# Altium PCB ClarinetSensor.PcbDoc
Units mm, origin at the board's own origin, x right, y up, seen from the top; angles counter-clockwise.
Board outline 152.4 x 101.6 mm, 2 copper layers (F.Cu, B.Cu); 28 components, 16 nets, 124 pads, 34 vias.
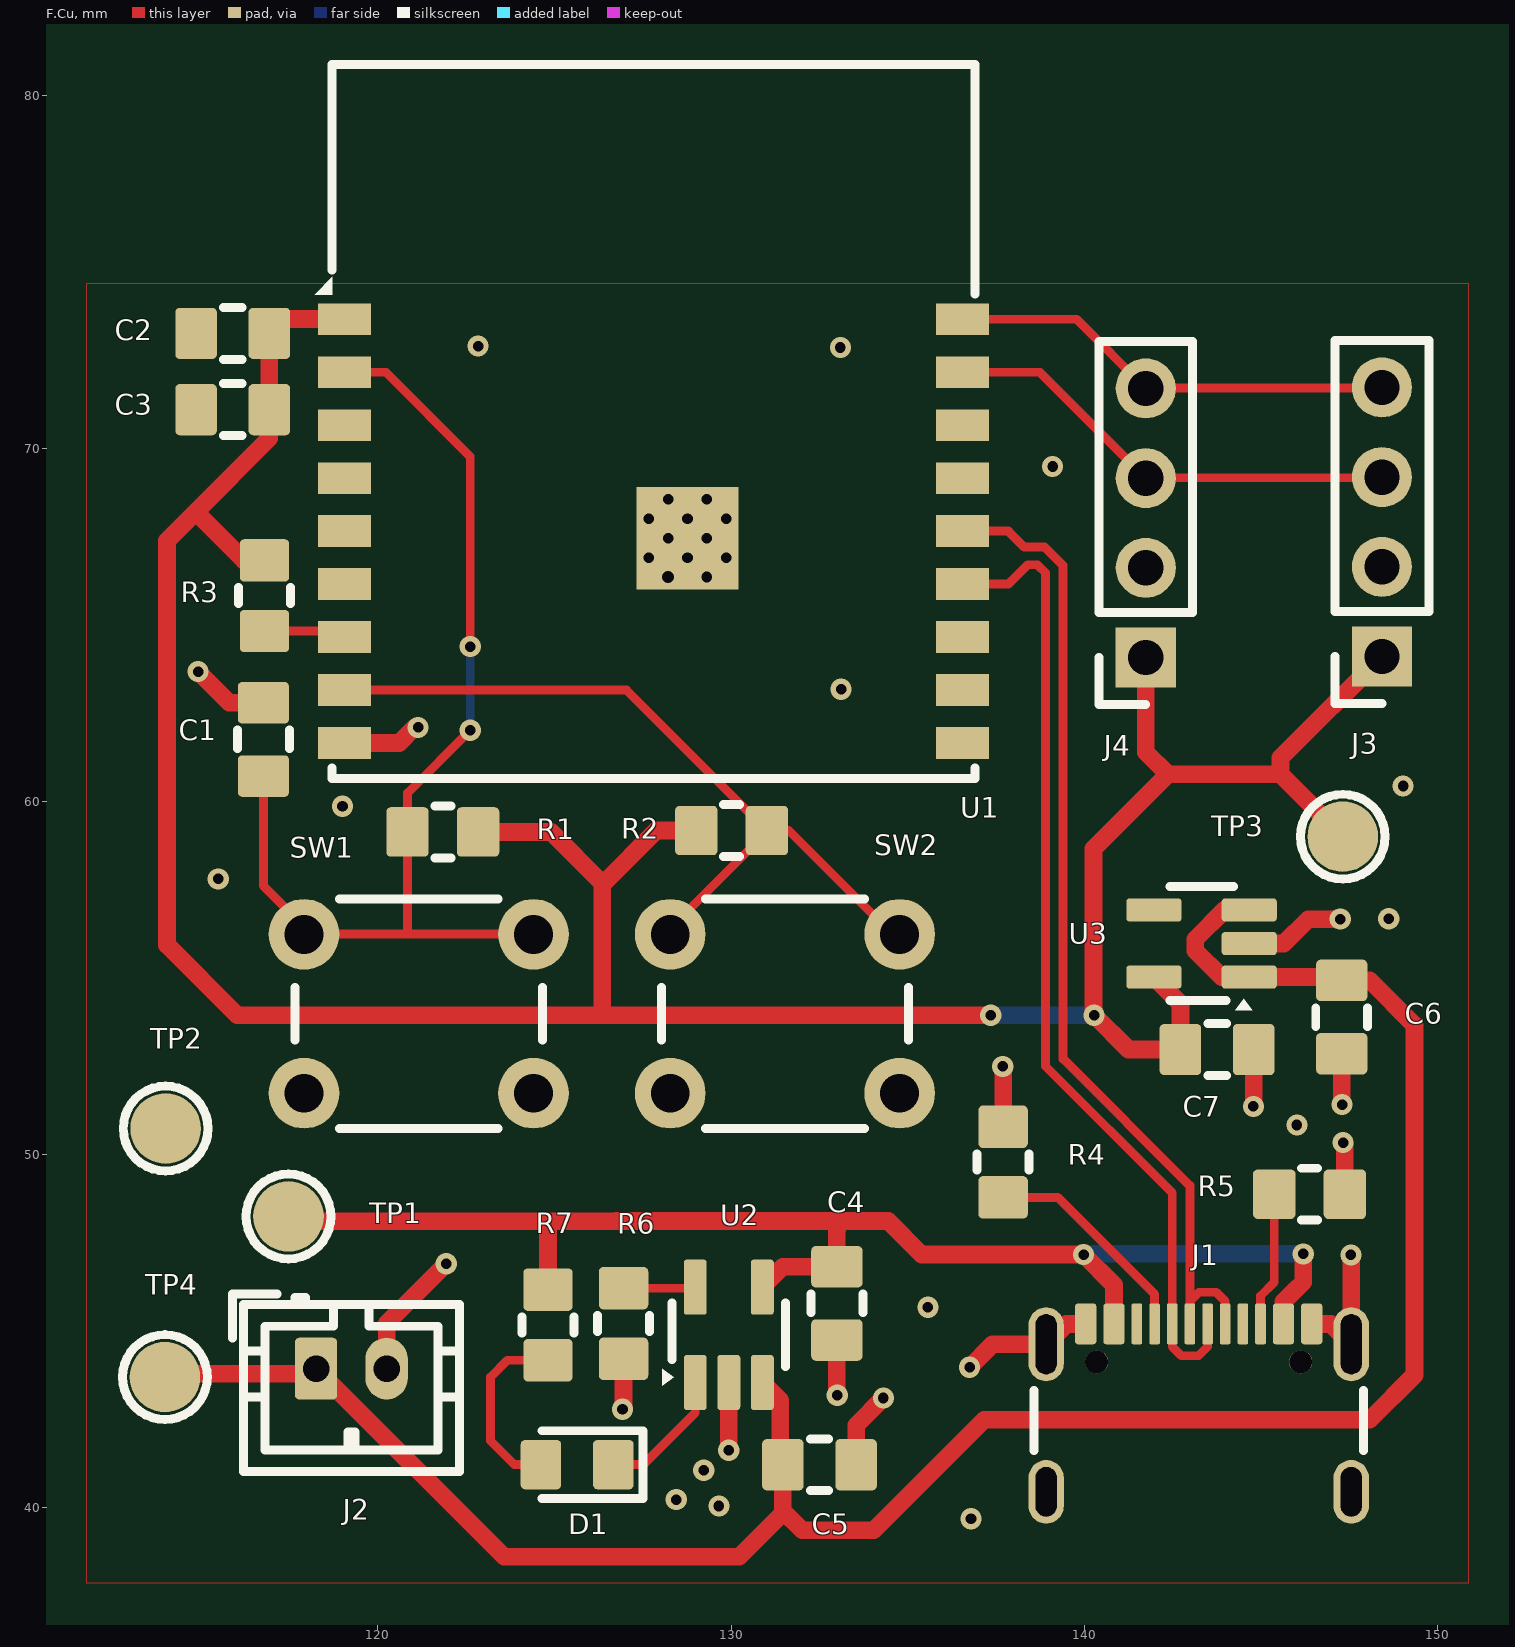
[diagram p0: F.Cu view]
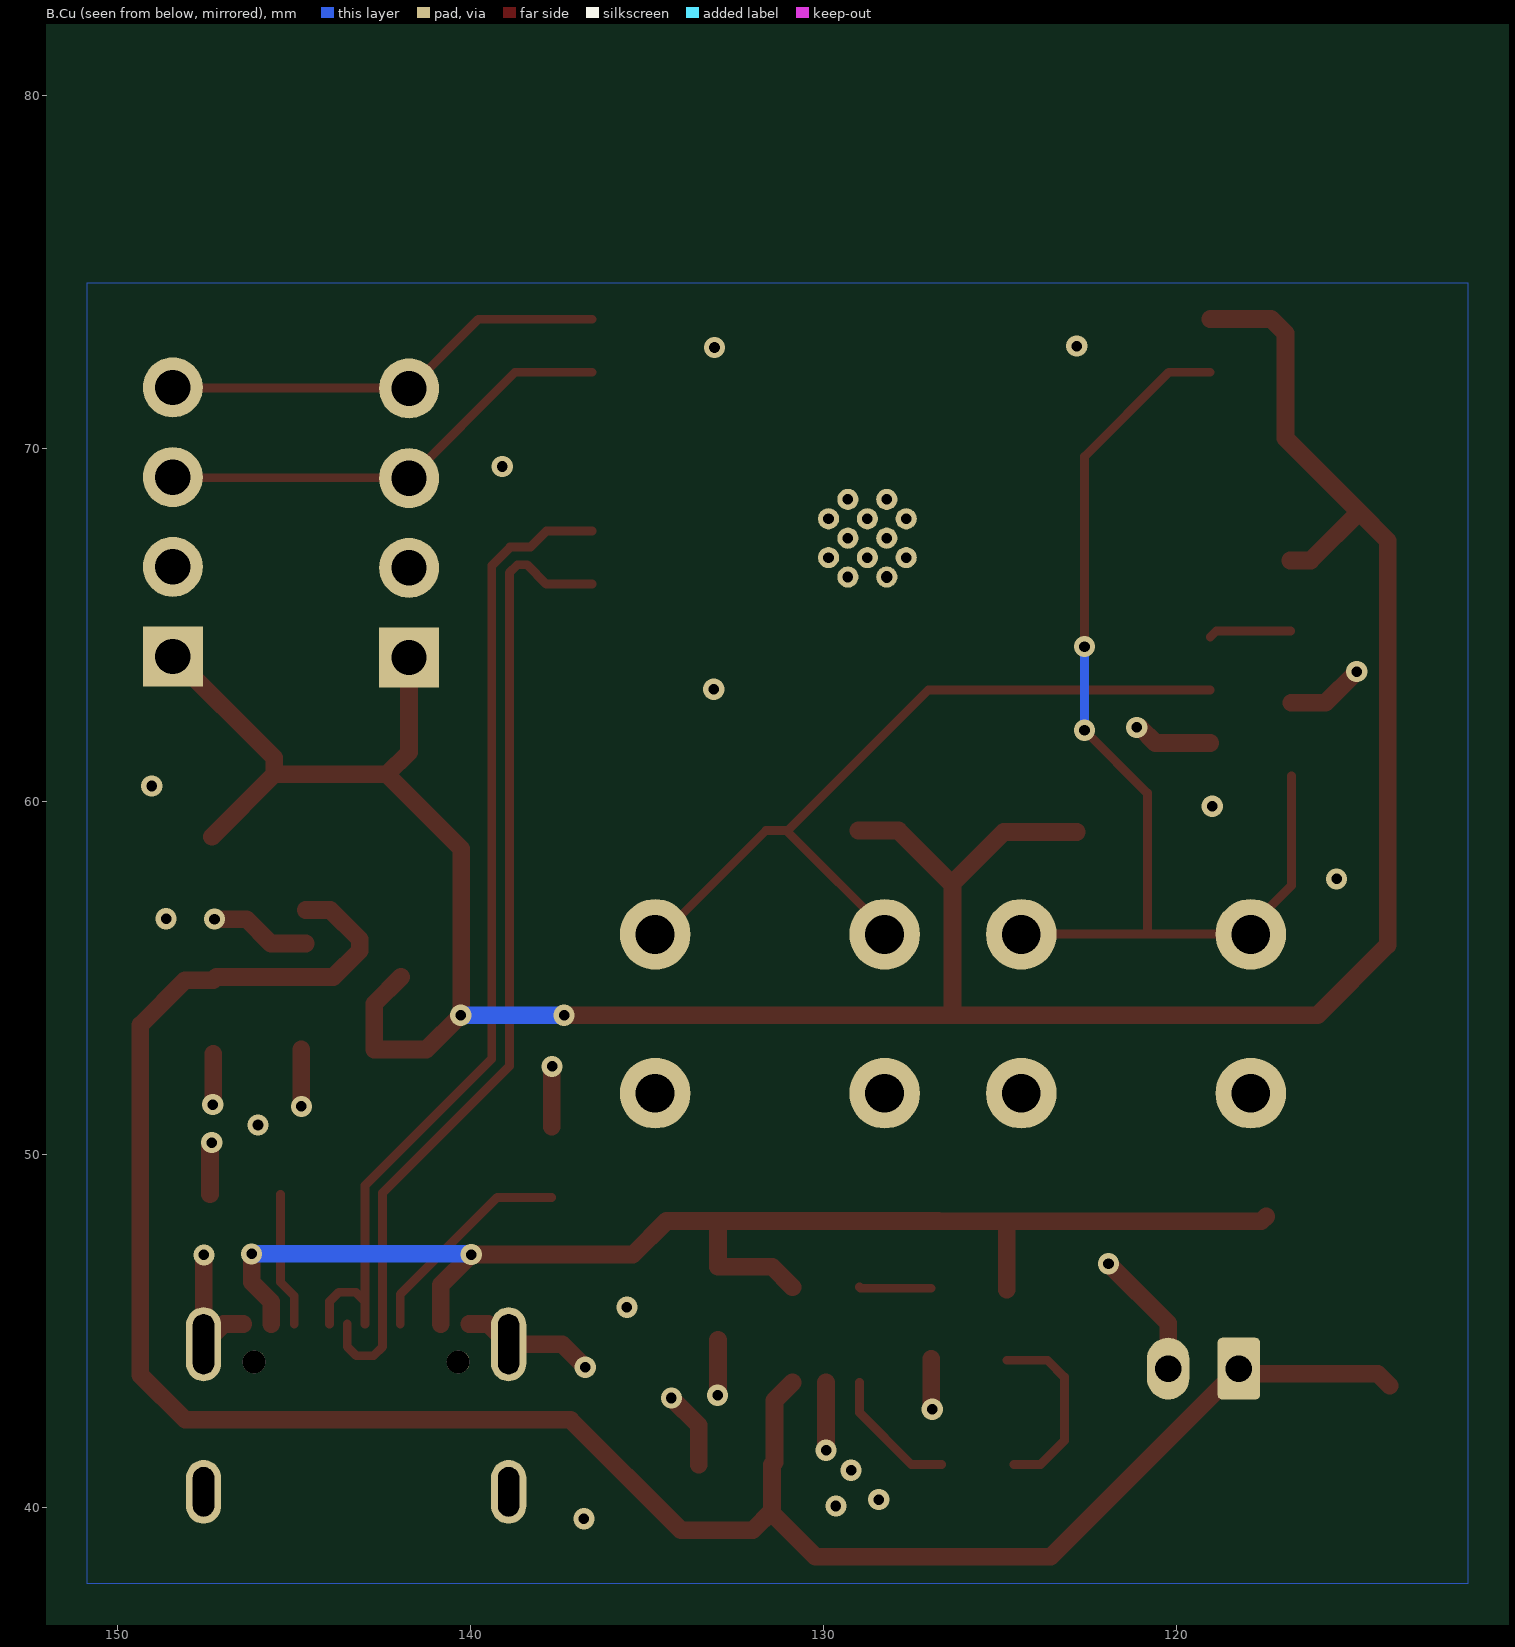
[diagram p1: B.Cu view, seen from below]

## Layer stack, top to bottom
F.Mask: solder mask 0.0102, Solder Resist, Dk 3.5
F.Cu: signal copper 0.0356
Dielectric 1: dielectric 0.32, FR-4, Dk 4.8
B.Cu: signal copper 0.0356
B.Mask: solder mask 0.0102, Solder Resist, Dk 3.5

## Board outline
25.4,25.4 177.8,25.4 177.8,127 25.4,127

## Design rules (kind name [scope] priority, off if disabled: settings)
Clearance "Clearence 0.5_Polygon" [InNamedPolygon('F.Cu-') OR InNamedPolygon('B.Cu-')] p1: gap=0.5 ignorepadtopadclearanceinfootprint=FALSE
Clearance "Clearence 0.2_NetClass" [InNetClass('Default')] p2: gap=0.2 ignorepadtopadclearanceinfootprint=FALSE
MinimumSolderMaskSliver [All] p1: minsoldermaskwidth=0
PolygonConnect Polygon_B.Cu-_ConnectDirect [IsNamedPolygon('B.Cu-') vs IsVia] p1: connectstyle=Direct reliefconductorwidth=0.254 reliefentries=4 polygonreliefangle="90 Angle" airgapwidth=0.254
PolygonConnect Polygon_B.Cu-_ConnectRelief45 [IsNamedPolygon('B.Cu-') vs (IsThruPin or IsSMTPin) and (PadShape_AllLayers = 'Round')] p2: connectstyle=Relief reliefconductorwidth=0.5 reliefentries=4 polygonreliefangle="45 Angle" airgapwidth=0.5
PolygonConnect Polygon_B.Cu-_ConnectRelief90 [IsNamedPolygon('B.Cu-') vs (IsThruPin or IsSMTPin) and (PadShape_AllLayers <> 'Round')] p3: connectstyle=Relief reliefconductorwidth=0.5 reliefentries=4 polygonreliefangle="90 Angle" airgapwidth=0.5
PolygonConnect Polygon_F.Cu-_ConnectDirect [IsNamedPolygon('F.Cu-') vs IsVia] p4: connectstyle=Direct reliefconductorwidth=0.254 reliefentries=4 polygonreliefangle="90 Angle" airgapwidth=0.254
PolygonConnect Polygon_F.Cu-_ConnectRelief45 [IsNamedPolygon('F.Cu-') vs (IsThruPin or IsSMTPin) and (PadShape_AllLayers = 'Round')] p5: connectstyle=Relief reliefconductorwidth=0.5 reliefentries=4 polygonreliefangle="45 Angle" airgapwidth=0.5
PolygonConnect Polygon_F.Cu-_ConnectRelief90 [IsNamedPolygon('F.Cu-') vs (IsThruPin or IsSMTPin) and (PadShape_AllLayers <> 'Round')] p6: connectstyle=Relief reliefconductorwidth=0.5 reliefentries=4 polygonreliefangle="90 Angle" airgapwidth=0.5
RoutingVias [All] p1: holewidth=0.711 width=1.27 viastyle="Through Hole" minholewidth=0.711 minwidth=1.27 maxholewidth=0.711 maxwidth=1.27
SilkToSilkClearance [All] p1: silktosilkclearance=0
SilkToSolderMaskClearance [IsPad] p1: minsilkscreentomaskgap=0 clearancetoexposedcopper=TRUE
SolderMaskExpansion [All] p1: expansion=0 istentingtop=FALSE
SupplyNets "Schematic Supply Nets_2" [InNet('+5V')] p1: voltage=0.000
SupplyNets "Schematic Supply Nets_1" [InNet('+3.3V')] p2: voltage=0.000
SupplyNets "Schematic Supply Nets" [InNet('GND')] p3: voltage=0.000
Width [All] p1: maxlimit=10 minlimit=0.254 preferedwidth=0.2 minimp=50.000000 maximp=50.000000 favimp=50.000000
27 further rules are at their usual default settings.

## Classes and differential pairs
component class ClarinetSensor: C1 C5 C7 D1 J1 J2 J3 J4 R1 R4 R5 R6 R7 SW1 SW2 TP1 TP2 TP3 TP4 U1 U2

## Components (designator, comment, footprint, x,y, rotation, side; value= is the part's Value field where it differs from the comment)
C1 "1u" C_0805_2012Metric_Pad1.18x1.45mm_HandSolder 116.756,61.753 r90 top
C2 "0.1u" C_0805_2012Metric_Pad1.18x1.45mm_HandSolder 115.886,73.253 r180 top
C3 "10u" C_0805_2012Metric_Pad1.18x1.45mm_HandSolder 115.886,71.093 r180 top
C4 "4.7u" C_0805_2012Metric_Pad1.18x1.45mm_HandSolder 132.996,45.78 r90 top
C5 "4.7u" C_0805_2012Metric_Pad1.18x1.45mm_HandSolder 132.506,41.21 r0 top
C6 "1u" C_0805_2012Metric_Pad1.18x1.45mm_HandSolder 147.296,53.89 r270 top
C7 "1u" C_0805_2012Metric_Pad1.18x1.45mm_HandSolder 143.766,52.97 r0 top
D1 "LED" LED_0805_2012Metric_Pad1.15x1.40mm_HandSolder 125.641,41.213 r180 top
J1 "USB_C_Receptacle_USB2.0_16P" USB_C_Receptacle_GCT_USB4105-xx-A_16P_TopMnt_Horizontal 143.246,41.518 r0 top
J2 "Conn_01x02" JST_PH_B2B-PH-K_1x02_P2.00mm_Vertical 118.246,43.933 r0 top
J3 "SHT31" PinSocket_1x04_P2.54mm_Vertical 148.436,64.103 r180 top
J4 "OLED Connector" PinSocket_1x04_P2.54mm_Vertical 141.746,64.073 r180 top
R1 "10k" R_0805_2012Metric_Pad1.20x1.40mm_HandSolder 121.836,59.133 r180 top
R2 "10k" R_0805_2012Metric_Pad1.20x1.40mm_HandSolder 130.016,59.173 r0 top
R3 "10k" R_0805_2012Metric_Pad1.20x1.40mm_HandSolder 116.786,65.823 r270 top
R4 "5.1k" R_0805_2012Metric_Pad1.20x1.40mm_HandSolder 137.706,49.783 r270 top
R5 "5.1k" R_0805_2012Metric_Pad1.20x1.40mm_HandSolder 146.386,48.873 r180 top
R6 "4.7k" R_0805_2012Metric_Pad1.20x1.40mm_HandSolder 126.956,45.21 r90 top
R7 "1k" R_0805_2012Metric_Pad1.20x1.40mm_HandSolder 124.816,45.17 r90 top
SW1 "SW_Push" SW_PUSH_6mm_H5mm 117.906,56.233 r0 top
SW2 "SW_Push" SW_PUSH_6mm_H5mm 128.276,56.233 r0 top
TP1 "5V" TestPoint_Pad_D2.0mm 117.466,48.243 r0 top
TP2 "GND" TestPoint_Pad_D2.0mm 113.986,50.733 r0 top
TP3 "3.3V" TestPoint_Pad_D2.0mm 147.326,59 r0 top
TP4 "VBAT" TestPoint_Pad_D2.0mm 113.966,43.693 r0 top
U1 "ESP32-C3-WROOM-02" ESP32-C3-WROOM-02 127.806,67.653 r0 top
U2 "MCP73831-2-OT" SOT-23-5_HandSoldering 129.936,44.89 r90 top
U3 "AP2112K-3.3" SOT-23-5_HandSoldering 143.326,55.973 r180 top

## Footprints (in the part's own frame and the unit in brackets; to place one, negate y for a bottom-side part, rotate by r counter-clockwise, add the part's x,y. Pads: shape width x height; smd on the part's side, far side on the other; paste and mask are expansions set on the pad)
C_0805_2012Metric_Pad1.18x1.45mm_HandSolder [mm]
  rrect21% 1.175x1.45 smd mask+0: 1(-1.038,0) 2(1.038,0)
  silkscreen extent -0.26,-0.73 0.26,0.73
ESP32-C3-WROOM-02 [mm]
  rect 1.5x0.9 smd mask+0: 1(-8.75,6) 2(-8.75,4.5) 3(-8.75,3) 4(-8.75,1.5) 5(-8.75,0) 6(-8.75,-1.5) 7(-8.75,-3) 8(-8.75,-4.5) 9(-8.75,-6) 10(8.75,-6) 11(8.75,-4.5) 12(8.75,-3) 13(8.75,-1.5) 14(8.75,0) 15(8.75,1.5) 16(8.75,3) 17(8.75,4.5) 18(8.75,6)
  round 0.6 hole 0.3 mask+0: 19(-0.14,-0.75) 19(-0.14,0.35) 19(0.41,-0.2) 19(0.41,0.9) 19(0.96,-0.75) 19(0.96,0.35) 19(1.51,-1.3) 19(1.51,-0.2) 19(1.51,0.9) 19(2.06,-0.75) 19(2.06,0.35)
  round 0.6 hole 0.33 mask+0: 19(0.41,-1.3)
  rect 2.9x2.9 smd paste-2.9 mask+0: 19(0.96,-0.2)
  rect 0.7x0.7 on Top Paste mask-0.7: Un1(-0.14,0.9) Un2(-0.14,-0.2) Un3(-0.14,-1.3) Un4(0.96,0.9) Un5(0.96,-0.2) Un6(0.96,-1.3) Un7(2.06,0.9) Un8(2.06,-0.2) Un9(2.06,-1.3)
  silkscreen extent -9.6,-7.01 9.11,13.21
JST_PH_B2B-PH-K_1x02_P2.00mm_Vertical [mm]
  rrect21% 1.2x1.75 hole 0.75 mask+0: 1(0,0)
  rrect100% 1.2x1.75 hole 0.75 mask+0: 2(2,0)
  silkscreen extent -2.36,-2.91 4.06,2.11
LED_0805_2012Metric_Pad1.15x1.40mm_HandSolder [mm]
  rrect22% 1.15x1.4 smd mask+0: 1(-1.025,0) 2(1.025,0)
  silkscreen extent -1.86,-0.96 1,0.96
PinSocket_1x04_P2.54mm_Vertical [mm]
  rect 1.7x1.7 hole 1 mask+0: 1(0,0)
  round 1.7 hole 1 mask+0: 2(0,-2.54) 3(0,-5.08) 4(0,-7.62)
  silkscreen extent -1.33,-8.95 1.33,1.33
R_0805_2012Metric_Pad1.20x1.40mm_HandSolder [mm]
  rrect21% 1.2x1.4 smd mask+0: 1(-1,0) 2(1,0)
  silkscreen extent -0.23,-0.73 0.23,0.73
SOT-23-5_HandSoldering [mm]
  rrect25% 1.56x0.65 smd mask+0: 1(-1.35,0.95) 2(-1.35,0) 3(-1.35,-0.95) 4(1.35,-0.95) 5(1.35,0.95)
  silkscreen extent -1.44,-1.61 0.9,1.89
SW_PUSH_6mm_H5mm [mm]
  round 2 hole 1.1 mask+0: 1(0,0) 1(6.5,0) 2(0,-4.5) 2(6.5,-4.5)
  silkscreen extent -0.25,-5.5 6.75,1
TestPoint_Pad_D2.0mm [mm]
  round 2 smd paste-2 mask+0: 1(0,0)
  silkscreen extent -1.2,-1.2 1.2,1.2
USB_C_Receptacle_GCT_USB4105-xx-A_16P_TopMnt_Horizontal [mm]
  rrect25% 0.6x1.15 smd mask+0: A1(-3.2,3.68) A4(-2.4,3.68) A9(2.4,3.68) A12(3.2,3.68) B1(3.2,3.68) B4(2.4,3.68) B9(-2.4,3.68) B12(-3.2,3.68)
  rrect25% 0.3x1.15 smd mask+0: A5(-1.25,3.68) A6(-0.25,3.68) A7(0.25,3.68) A8(1.25,3.68) B5(1.75,3.68) B6(0.75,3.68) B7(-0.75,3.68) B8(-1.75,3.68)
  rrect100% 1x1.8 hole 1.4 slot 0.6 at 0 deg mask+0: SH(-4.32,-1.075) SH(4.32,-1.075)
  rrect100% 1x2.1 hole 1.7 slot 0.6 at 0 deg mask+0: SH(-4.32,3.105) SH(4.32,3.105)
  round 0.65 hole 0.65 mask+0: Un1(-2.89,2.605) Un2(2.89,2.605)
  silkscreen extent -4.67,0.1 4.67,1.8

## Part data
C1 C2 C3 C4 C5 C6 C7: library part C_Small
J3 J4: library part Conn_01x04
R1 R2 R3 R4 R5 R6 R7: library part R_Small
TP1 TP2 TP3 TP4: library part TestPoint
D1: Sim.Pins="1=K 2=A"

## Via types
v1: diameter 0.6, hole 0.3, F.Cu to B.Cu, tented both sides, 34 vias

## Nets (pads, with @x,y where several pads share a name; then routed paths per layer and width w, separated by ;. In a path a pad name is that pad's centre, name@x,y a point inside that pad or via, vN(x,y) a via of type N, cw(c..) or ccw(c..) an arc to the next point about the centre after c; other vN are vias at no path point)
+3.3V: C2.1 C3.1 C7.1 J3.1 J4.1 R1.1 R2.1 R3.1 TP3.1 U1.1 U3.5 | length 88.3
  F.Cu w0.5: R3.1 116.206,66.823 114.836,68.193 ; U1.1 119.046,73.663 117.333,73.663 C2.1 C3.1 116.923,70.28 114.836,68.193 ; R1.1 124.906,59.133 126.356,57.683 ; R2.1 127.886,59.173 126.396,57.683 126.356,57.683 ; v1(137.356,53.943) 126.356,53.943 ; J4.1 141.746,61.393 142.376,60.763 ; U3.5 142.729,54.27 C7.1 141.256,52.97 v1(140.283,53.943) 140.266,53.96 140.266,58.653 142.376,60.763 ; TP3.1 145.564,60.763 ; J3.1 145.564,61.23 145.564,60.763 ; 114.836,68.193 114.026,67.383 114.026,55.933 116.016,53.943 126.356,53.943 ; 126.356,53.943 126.356,57.683 ; 142.376,60.763 144.636,60.763 144.896,60.763 145.156,60.763 145.564,60.763
  B.Cu w0.5: v1(137.356,53.943) v1(140.283,53.943)
+5V: C4.2 J1.A4 J1.A9 J1.B4 J1.B9 R7.2 TP1.1 U2.4 | length 39.3
  F.Cu w0.5: TP1.1 117.606,48.103 124.806,48.103 ; R7.2 124.816,48.093 124.806,48.103 ; U2.4 131.463,46.818 C4.2 132.996,47.863 133.006,47.873 133.006,48.113 ; J1.A4 140.846,46.303 v1(139.986,47.163) 135.406,47.163 134.456,48.113 133.006,48.113 ; J1.A9 145.646,45.826 146.043,46.223 146.046,46.223 146.206,46.383 v1(146.206,47.183) ; 124.806,48.103 126.748,48.103 126.758,48.113 133.006,48.113
  B.Cu w0.5: v1(139.986,47.163) 140.006,47.183 v1(146.206,47.183)
D+: J1.A6 J1.B6 U1.14 | length 28.7
  F.Cu w0.25: U1.14 137.856,67.653 138.309,67.2 138.883,67.2 139.406,66.677 139.406,52.707 142.996,49.117 J1.A6 142.996,45.841 143.253,46.098 143.739,46.098 143.996,45.841 J1.B6
D-: J1.A7 J1.B7 U1.13 | length 27.9
  F.Cu w0.25: U1.13 137.856,66.153 138.403,66.7 138.676,66.7 138.906,66.469 138.906,52.499 142.496,48.909 J1.B7 142.496,44.555 142.753,44.298 143.239,44.298 143.496,44.555 J1.A7
EN: C1.1 R1.2 SW1.1 U1.2 | length 30.4
  F.Cu w0.25: C1.1 116.756,57.613 118.126,56.243 120.856,56.243 ; U1.2 120.226,72.153 122.616,69.763 v1(122.616,64.383) ; v1(122.616,62.013) 120.836,60.233 R1.2 120.836,56.263 120.856,56.243 ; SW1.1@124.626,56.243 120.856,56.243
  B.Cu w0.25: v1(122.616,62.013) v1(122.616,64.383)
GND: C1.2 C2.2 C3.2 C4.1 C5.2 C6.2 C7.2 J1.A1 J1.A12 J1.B1 J1.B12 J1.SH J2.2 J3.2 J4.2 R4.1 R5.1 R6.1 SW1.2 SW2.2 TP2.1 U1.9 U1.19 U2.2 U3.2 | length 32.1
  F.Cu w0.5: v1(114.906,63.673) 115.789,62.79 C1.2 ; U1.9 120.606,61.653 121.046,62.093 v1(121.136,62.093) ; J2.2 120.246,45.213 v1(121.936,46.903) ; v1(126.926,42.78) 126.956,42.81 R6.1 ; v1(129.936,41.62) U2.2 ; C4.1 132.996,43.19 v1(133.006,43.18) ; C5.2 133.543,42.328 v1(134.316,43.1) ; v1(136.756,43.973) 137.406,44.623 138.926,44.623 139.501,45.198 J1.A1 ; v1(137.696,52.493) 137.706,52.483 R4.1 ; U3.2 145.658,55.973 146.349,56.663 v1(147.256,56.663) ; v1(144.796,51.36) 144.804,51.368 C7.2 ; J1.A12 146.991,45.198 147.566,44.623 147.566,47.143 v1(147.556,47.153) ; C6.2 147.296,51.42 v1(147.306,51.41) ; v1(147.336,50.333) 147.386,50.283 R5.1
IO9: R2.2 SW2.1 U1.8 | length 22.6
  F.Cu w0.25: U1.8 127.036,63.153 R2.2 ; SW2.1@128.096,56.213 131.016,59.133 R2.2 ; SW2.1@134.596,56.213 131.636,59.173 R2.2
NetD1_1: D1.1 U2.1 | length 3.8
  F.Cu w0.25: D1.1 127.516,41.213 128.986,42.683 U2.1
NetD1_2: D1.2 R7.1 | length 5.3
  F.Cu w0.25: D1.2 123.866,41.213 123.186,41.893 123.186,43.693 123.663,44.17 R7.1
NetJ1_A5: J1.A5 R4.2 | length 6.3
  F.Cu w0.25: R4.2 139.25,48.783 141.996,46.037 J1.A5
NetJ1_B5: J1.B5 R5.2 | length 3.8
  F.Cu w0.25: J1.B5 144.996,45.989 145.386,46.379 R5.2
NetR3_2: R3.2 U1.7 | length 2.3
  F.Cu w0.25: R3.2 118.886,64.823 U1.7
NetR6_2: R6.2 U2.5 | length 2
  F.Cu w0.25: R6.2 128.956,46.21 U2.5
SCL: J3.3 J4.3 U1.17 | length 13.2
  F.Cu w0.25: U1.17 138.746,72.153 J4.3 141.856,69.263 142.316,69.263 142.416,69.163 148.416,69.163 J3.3
SDA: J3.4 J4.4 U1.18 | length 12.8
  F.Cu w0.25: U1.18 139.786,73.653 J4.4 141.856,71.803 142.316,71.803 142.416,71.703 148.416,71.703 J3.4
VBAT: C5.1 C6.1 J2.1 TP4.1 U2.3 U3.1 U3.3 | length 64.8
  F.Cu w0.5: TP4.1@113.966,43.443 114.306,43.783 118.096,43.783 J2.1 123.576,38.603 130.236,38.603 131.469,39.835 C5.1 ; U2.3 131.396,43.03 131.396,41.283 C5.1 ; U3.3 143.975,56.923 143.146,56.094 143.146,55.773 143.896,55.023 U3.1 147.201,55.023 C6.1 148.091,54.928 149.356,53.663 149.356,43.753 148.086,42.483 137.176,42.483 134.046,39.353 132.016,39.353 131.469,39.9 C5.1
pads on no net: J1.A8 J1.B8 J1.Un1 J1.Un2 U1.3 U1.4 U1.5 U1.6 U1.10 U1.11 U1.12 U1.15 U1.16 U1.Un1 U1.Un2 U1.Un3 U1.Un4 U1.Un5 U1.Un6 U1.Un7 U1.Un8 U1.Un9 U3.4
copper on no net:
  other v1: 136.796,39.683 129.656,40.043 128.446,40.223 129.226,41.053 135.576,45.673 146.026,50.833 148.626,56.673 115.476,57.803 118.996,59.863 149.036,60.433 133.116,63.173 139.106,69.483 133.096,72.853 122.836,72.893

## Polygon pours and split planes (outlines as drawn)
GND on B.Cu "B.Cu-" (solid, remove dead copper, shelved, pour order 1): 111.751,74.673 150.876,74.673 150.876,37.853 111.751,37.853
GND on F.Cu "F.Cu-" (solid, remove dead copper, shelved, pour order 0): 111.751,74.673 150.876,74.673 150.876,37.853 111.751,37.853

## Silkscreen, mask and mechanical layers (free items; w line width, h text height)
Edge.Cuts:
  lines w0.254: 111.751,37.853 150.876,37.853 150.876,74.673 111.751,74.673 111.751,37.853

## Text inside footprints (layer, text, board x,y; h text height)
J1: Dwgs.User "PCB Edge" at 142.687,38.226 h0.5
U1: Cmts.User "KEEP-OUT ZONE" at 125.916,83.368 h1; Cmts.User "Antenna" at 126.863,77.369 h1; Cmts.User "5 mm" at 135.747,83.207 h0.5 r90; Cmts.User "5 mm" at 139.26,78.712 h0.5